# Altium PCB Beacon.PcbDoc
Units mm, origin at the board's own origin, x right, y up, seen from the top; angles counter-clockwise.
Board outline 35 x 35 mm, 2 copper layers (Top Layer, Bottom Layer); 43 components, 60 nets, 170 pads, 40 vias.
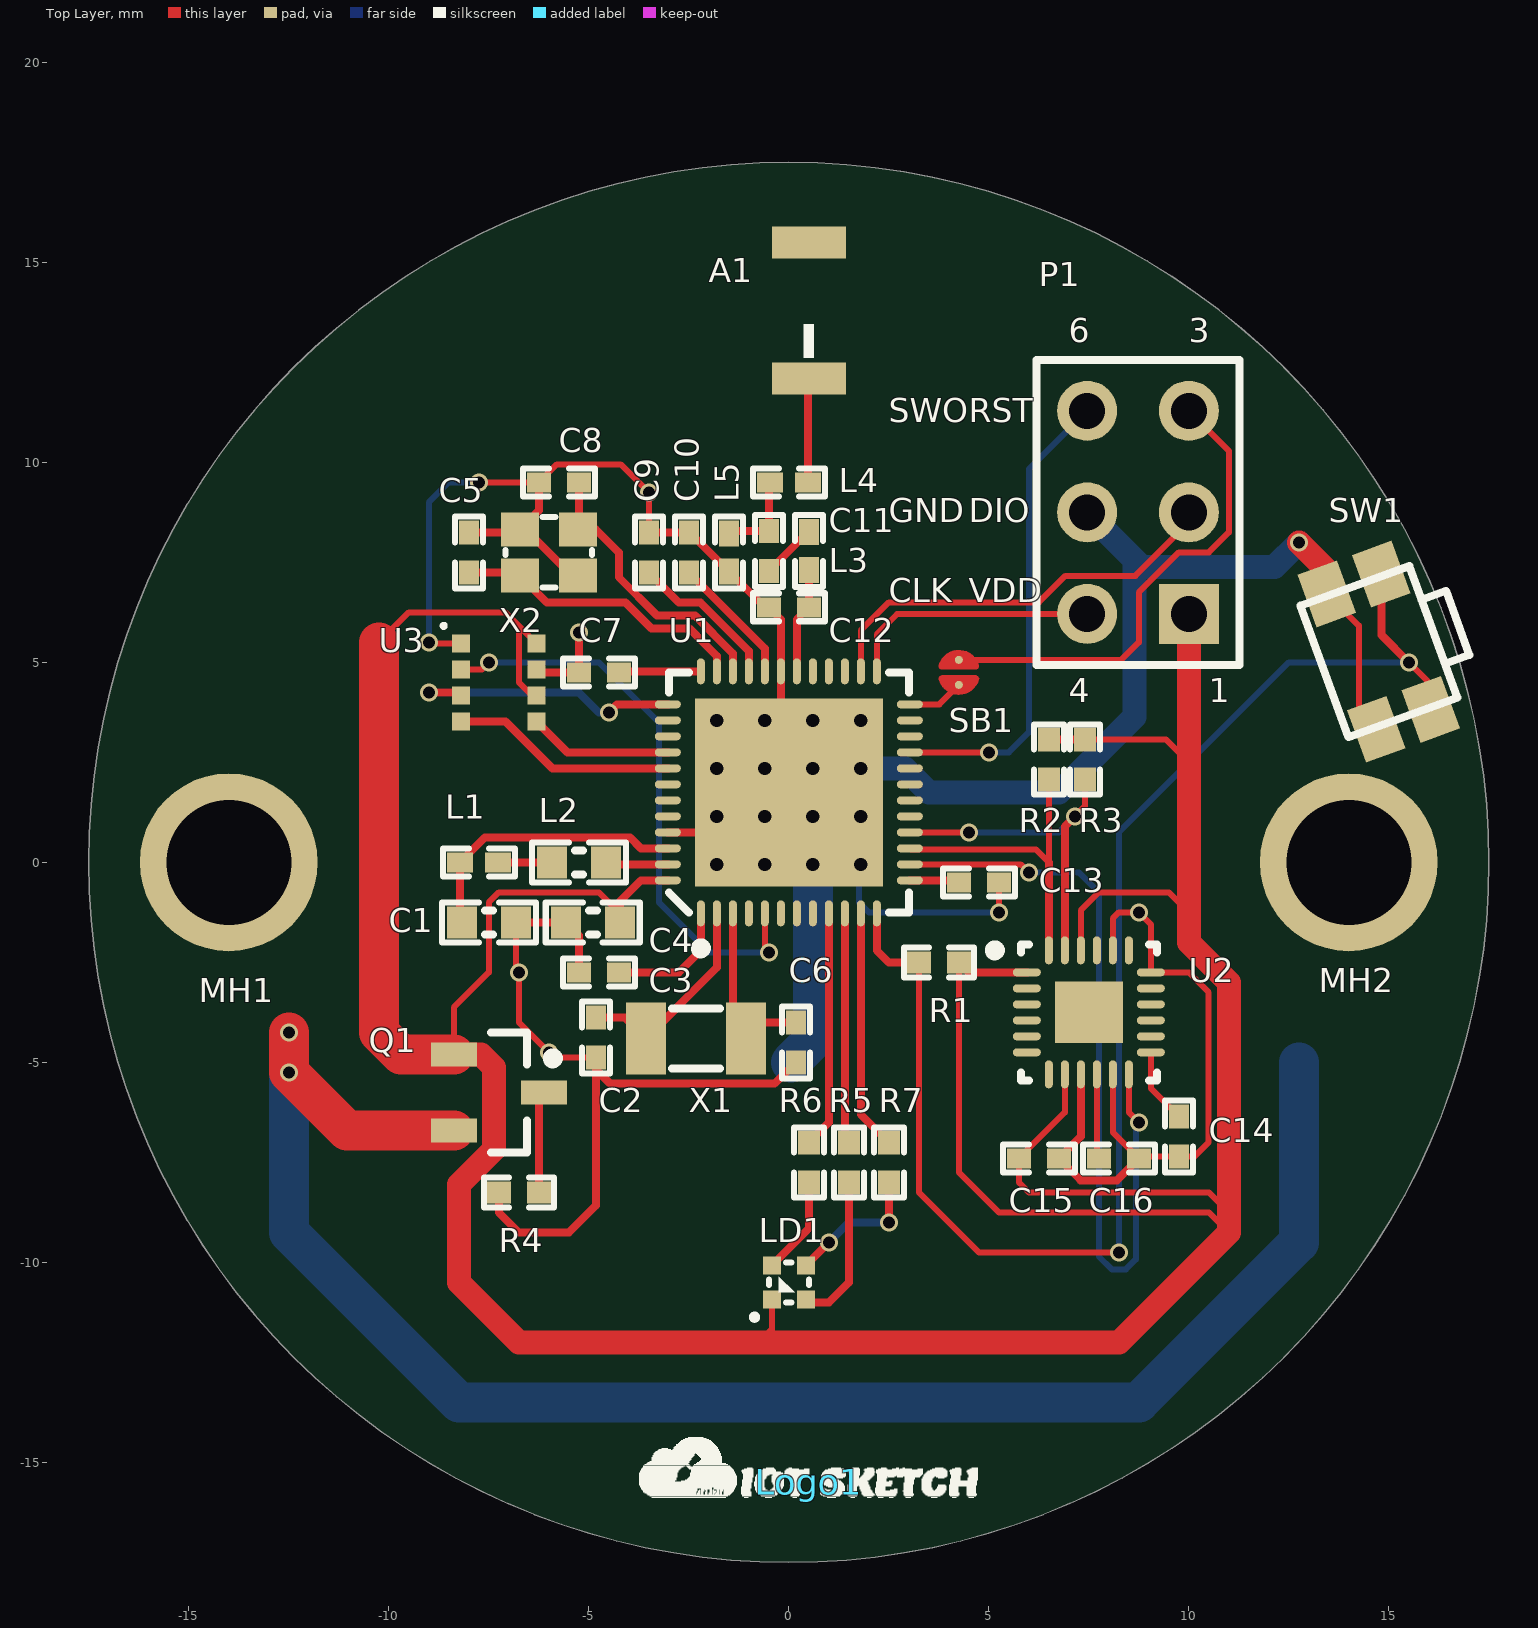
[diagram p0: Top Layer view]
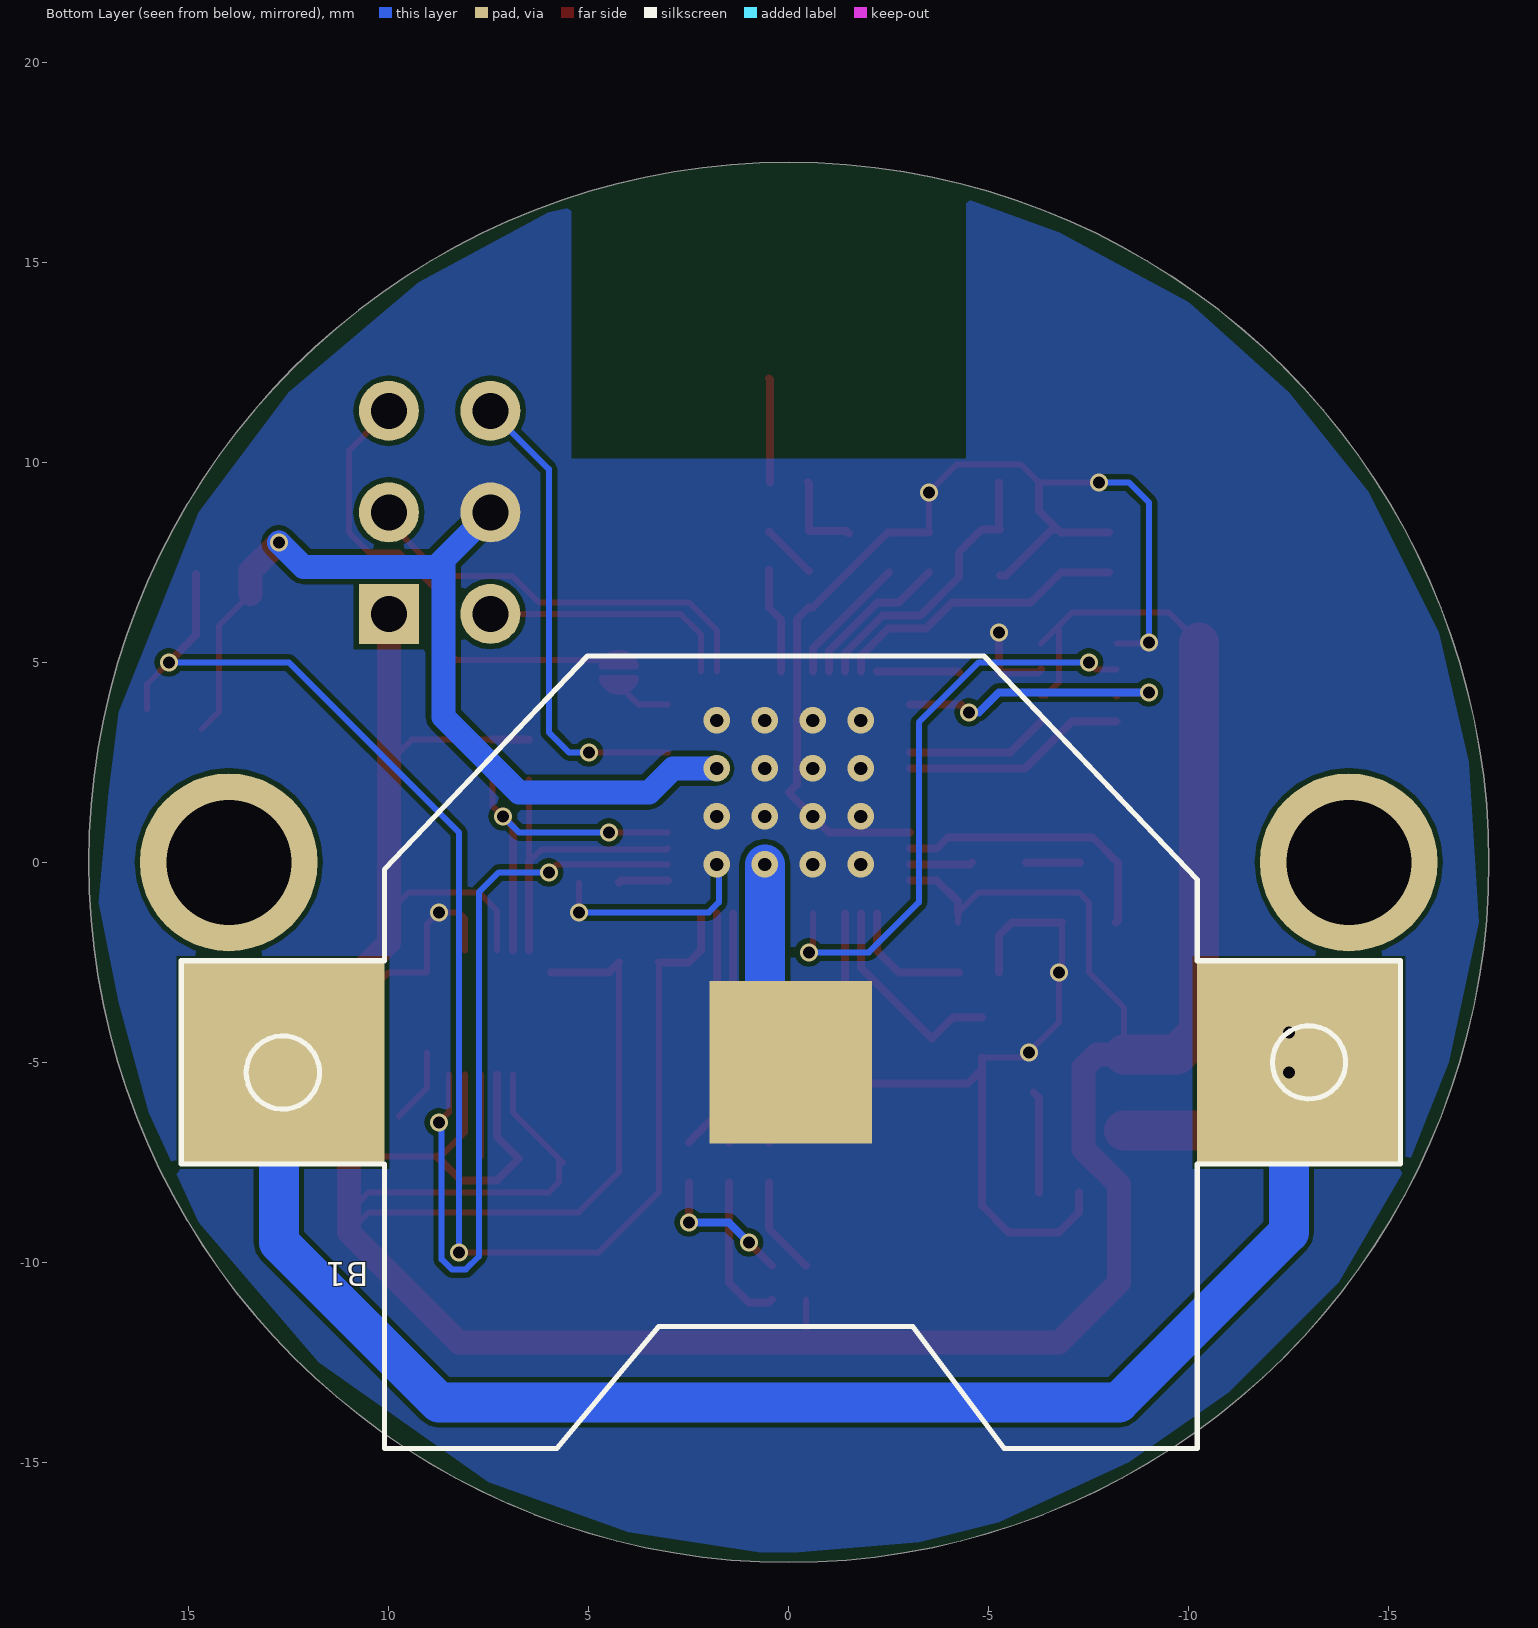
[diagram p1: Bottom Layer view, seen from below]
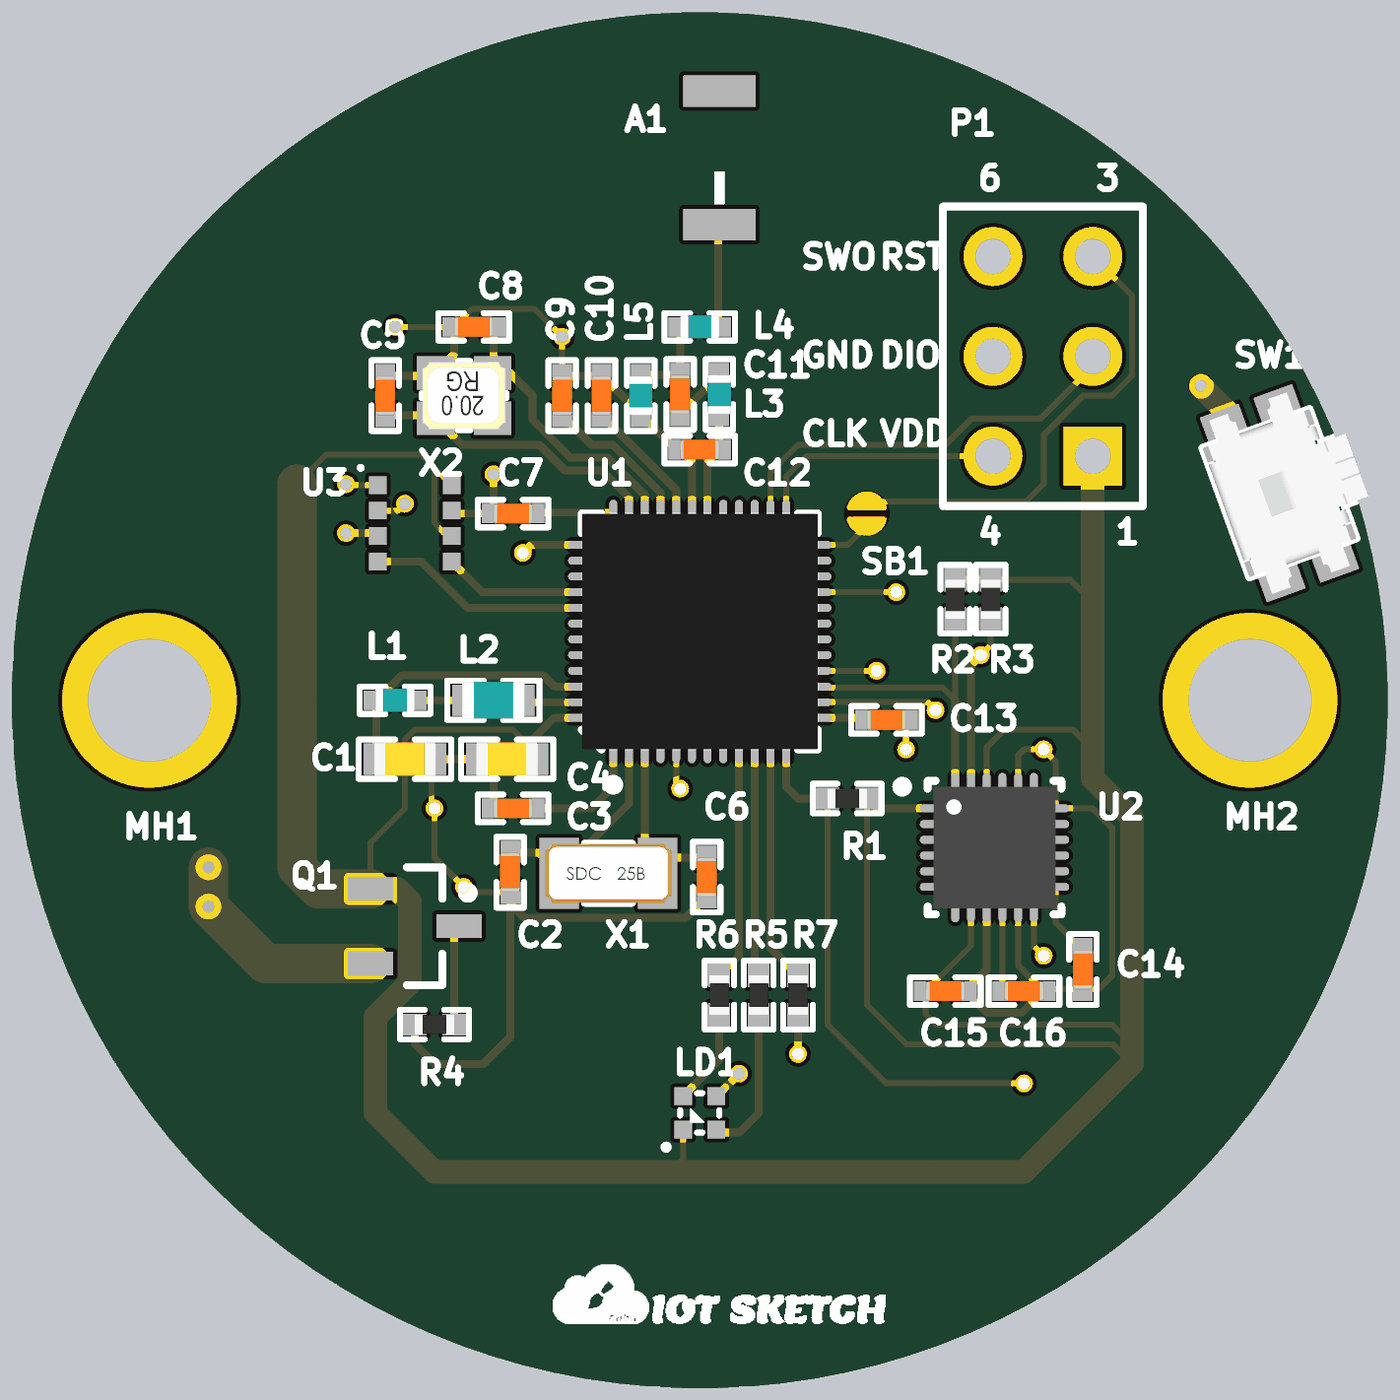
[diagram p2: 3D render of the assembled board from above, using the file's embedded part models]

## Layer stack, top to bottom
Top Solder: solder mask 0.0102, Solder Resist, Dk 3.5
Top Layer: signal copper 0.0356
Dielectric 1: dielectric 0.32, FR-4, Dk 4.8
Bottom Layer: signal copper 0.0356
Bottom Solder: solder mask 0.0102, Solder Resist, Dk 3.5

## Board outline
-17.502,0 ccw(c0,0) 0,-17.502 ccw(c0,0) 17.502,0 ccw(c0,0) 0,17.502 ccw(c0,0)
cut-out: -11.5,-13.25

## Design rules (kind name [scope] priority, off if disabled: settings)
Clearance [All] p1: gap=0.127 ignorepadtopadclearanceinfootprint=FALSE
ComponentClearance [All] p1: gap=0 collisioncheckmode=3 verticalgap=0 showdistances=FALSE
HoleSize [All] p1: absolutevalues=TRUE maxlimit=3.2 minlimit=0.025 maxpercent=80.000 minpercent=20.000
MinimumSolderMaskSliver [All] p1: minsoldermaskwidth=0
PlaneClearance [All] p1: clearance=0.25
PlaneConnect [All] p1: planeconnectstyle=Direct reliefexpansion=0.508 reliefentries=4 reliefconductorwidth=0.254 reliefairgap=0.254
PolygonConnect [All] p1: connectstyle=Direct reliefconductorwidth=0.254 reliefentries=4 polygonreliefangle="90 Angle" airgapwidth=0.254
RoutingVias [All] p1: holewidth=0.3 width=0.45 viastyle="Through Hole" minholewidth=0.3 minwidth=0.45 maxholewidth=0.8 maxwidth=1.2
SilkToSilkClearance [All] p1: silktosilkclearance=0
SilkToSolderMaskClearance [IsPad] p1: minsilkscreentomaskgap=0 clearancetoexposedcopper=TRUE
SolderMaskExpansion [All] p1: expansion=0.102
UnRoutedNet [All] p1: checkbadconnections=TRUE
Width [All] p1: maxlimit=1 minlimit=0.15 preferedwidth=0.2
22 further rules are at their usual default settings.

## Classes and differential pairs
net class RF: ANT GND NetA1_1 NetC11_1 NetC11_2
component class 03Sensors: C14 C15 C16 LD1 Logo1 MH1 MH2 P1 R5 R6 R7 SB1 U2 U3
component class 02NRF52: A1 B1 C1 C2 C3 C4 C5 C6 C7 C8 C9 C10 C11 C12 C13 L1 L2 L3 L4 L5 Q1 R1 R2 R3 R4 SW1 U1 X1 X2

## Components (designator, comment, footprint, x,y, rotation, side; value= is the part's Value field where it differs from the comment)
A1 "2450AT18B100" 2450AT18B100 0.5,13.8 r90 top
B1 "CR2032" CR2032-SMD_CR2032(Primary) -0.05,-5 r0 bottom
C1 "1.0µF" CAPC1608X06L -7.5,-1.5 r180 top
C2 "12pF" CAPC1005X04L -4.823,-4.377 r270 top
C3 "100nF" CAPC1005X04L -4.75,-2.75 r180 top
C4 "4.7µF" CAPC1608X06L -4.901,-1.5 r180 top
C5 "12pF" CAPC1005X04L -8,7.75 r90 top
C6 "12pF" CAPC1005X04L 0.177,-4.5 r270 top
C7 "100nF" CAPC1005X04L -4.75,4.75 r180 top
C8 "12pF" CAPC1005X04L -5.75,9.5 r180 top
C9 "100pF" CAPC1005X04L -3.5,7.75 r90 top
C10 "N.C." CAPC1005X04L -2.5,7.75 r270 top
C11 "1.2pF" CAPC1005X04L -0.5,7.779 r90 top
C12 "0.8pF" CAPC1005X04L 0,6.377 r0 top
C13 "100nF" CAPC1005X04L 4.75,-0.5 r0 top
C14 "100nF" CAPC1005X04L 9.75,-6.851 r90 top
C15 "10nF" CAPC1005X04L 6.25,-7.402 r180 top
C16 "100nF" CAPC1005X04L 8.25,-7.402 r180 top
L1 "15nH" INDC1005X04L -7.75,0 r0 top
L2 "10µH" INDC1608X06L -5.25,0 r0 top
L3 "3.9nH" INDC1005X04L 0.5,7.779 r90 top
L4 "3.3nH" INDC1005X04L 0,9.5 r0 top
L5 "2.7nH" INDC1005X04L -1.5,7.75 r90 top
LD1 "LED RGB" SML-LX0404SIUPGUSB 0,-10.5 r180 top
Logo1 "Logo" Logo 0.5,-15.5 r0 top
MH1 "MH" MH -14,0 r0 top
MH2 "MH" MH 14,0 r0 top
P1 "Header 3X2A" HDR2X3_CEN 10,6.21 r90 top
Q1 "PMOS-2" SOT23_N -7.25,-5.75 r0 top
R1 "10k" RESC1005X04L 3.75,-2.5 r0 top
R2 "4k7" RESC1005X04L 6.5,2.569 r270 top
R3 "4k7" RESC1005X04L 7.403,2.569 r270 top
R4 "10k" RESC1005X04L -6.75,-8.25 r0 top
R5 "680R" RESC1005X04L 1.5,-7.5 r270 top
R6 "2k2" RESC1005X04L 0.5,-7.5 r270 top
R7 "820R" RESC1005X04L 2.5,-7.5 r270 top
SB1 "Solderbridge" Solderbridge 4.25,4.75 r270 top
SW1 "PTS840 GK SMTR LFS" EVQP7A/J/B/K 14.75,5.269 r110 top
U1 "nRF52832-QFAA" QFN40P600X600X90-48N 0,1.75 r90 top
U2 "MPU-9250" QFN40P300X300X105_HS-25N 7.5,-3.75 r0 top
U3 "BME280" PSON65P250X100-8N -7.25,4.5 r0 top
X1 "32.768kHz" XTAL_3215 -2.323,-4.402 r0 top
X2 "32MHz" BT-XTAL_2016 -6,7.75 r180 top

## Footprints (in the part's own frame and the unit in brackets; to place one, negate y for a bottom-side part, rotate by r counter-clockwise, add the part's x,y. Pads: shape width x height; smd on the part's side, far side on the other; paste and mask are expansions set on the pad)
2450AT18B100 [mm]
  rect 0.8x1.85 smd: 1(-1.7,0) 2(1.7,0)
  Top Layer pour cut-out: -3.71,-4.94 -3.71,4.93 6.09,4.93 6.09,-4.94
  Bottom Layer pour cut-out: -3.71,-4.94 -3.71,4.93 6.09,4.93 6.09,-4.94
  silkscreen extent -1.18,-0.14 -0.34,0.14, body extent -1.7,-0.9 1.7,0.9, height 1.4
BT-XTAL_2016 [mm]
  rect 0.95x0.85 smd: 1(-0.725,-0.575) 2(0.725,-0.575) 3(0.725,0.575) 4(-0.725,0.575)
  silkscreen extent -1.08,-0.88 1.08,0.88, body extent -1.05,-0.85 1.05,0.85, height 0.56
CAPC1005X04L [mm]
  rect 0.6x0.5 smd: 1(-0.5,0) 2(0.5,0)
  silkscreen extent -0.9,-0.35 0.9,0.35, body extent -0.51,-0.25 0.51,0.25, height 0.5
CAPC1608X06L [mm]
  rect 0.75x0.8 smd: 1(-0.675,0) 2(0.675,0)
  silkscreen extent -1.17,-0.5 1.17,0.5, body extent -0.8,-0.43 0.8,0.43, height 0.8
CR2032-SMD_CR2032(Primary) [mil]
  rect 160x160 smd: NEG(0,0)
  rect 200x200 smd: POS(-500,0) POS(500,0)
  silkscreen extent -600,-400 600,380, body extent -594,-469 594,315, height 167
EVQP7A/J/B/K [mm]
  rect 1.4x1.05 smd: 1(-1.8,0.725) 1(1.8,0.725) 2(-1.8,-0.725) 2(1.8,-0.725)
  silkscreen extent -1.75,-2.1 1.75,1.45, body extent -2.35,-2.1 2.35,1.45, height 1.35
HDR2X3_CEN [mm] "Connector; Header; 3x2 Position"
  rect 1.5x1.5 hole 0.9: 1(0,0)
  round 1.5 hole 0.9: 2(2.54,0) 3(5.08,0) 4(0,2.54) 5(2.54,2.54) 6(5.08,2.54)
  silkscreen extent -1.27,-1.27 6.35,3.81
INDC1005X04L [mm]
  rect 0.65x0.5 smd: 1(-0.475,0) 2(0.475,0)
  silkscreen extent -0.9,-0.35 0.9,0.35, body extent -0.5,-0.3 0.5,0.3, height 0.5
INDC1608X06L [mm]
  rect 0.75x0.8 smd: 1(-0.675,0) 2(0.675,0)
  silkscreen extent -1.18,-0.5 1.17,0.5, body extent -0.8,-0.48 0.8,0.48, height 0.8
Logo [mm]
  silkscreen extent -4.24,-0.37 4.22,1.13
MH [mm]
  round 4.445 hole 3.125: MH(0,0)
PSON65P250X100-8N [mm] "PSON, 8-Leads, Body 2.50x2.50mm, Pitch 0.65mm, IPC Medium Density"
  rect 0.45x0.45 smd: 1(-0.94,0.975) 2(-0.94,0.325) 3(-0.94,-0.325) 4(-0.94,-0.975) 5(0.94,-0.975) 6(0.94,-0.325) 7(0.94,0.325) 8(0.94,0.975)
  silkscreen extent -1.43,1.36 -1.33,1.46, body extent -1.25,-1.25 1.25,1.25, height 1
QFN40P300X300X105_HS-25N [mm]
  rect 1.7x1.54 smd: 0(0,0)
  oval 0.7x0.2 smd: 1(-1.55,1) 2(-1.55,0.6) 3(-1.55,0.2) 4(-1.55,-0.2) 5(-1.55,-0.6) 6(-1.55,-1) 13(1.55,-1) 14(1.55,-0.6) 15(1.55,-0.2) 16(1.55,0.2) 17(1.55,0.6) 18(1.55,1)
  oval 0.2x0.7 smd: 7(-1,-1.55) 8(-0.6,-1.55) 9(-0.2,-1.55) 10(0.2,-1.55) 11(0.6,-1.55) 12(1,-1.55) 19(1,1.55) 20(0.6,1.55) 21(0.2,1.55) 22(-0.2,1.55) 23(-0.6,1.55) 24(-1,1.55)
  silkscreen extent -2.47,-1.7 1.7,1.7, body extent -1.55,-1.55 1.55,1.55, height 1.05
QFN40P600X600X90-48N [mm]
  oval 0.65x0.2 smd: 1(-3.025,2.2) 2(-3.025,1.8) 3(-3.025,1.4) 4(-3.025,1) 5(-3.025,0.6) 6(-3.025,0.2) 7(-3.025,-0.2) 8(-3.025,-0.6) 9(-3.025,-1) 10(-3.025,-1.4) 11(-3.025,-1.8) 12(-3.025,-2.2) 25(3.025,-2.2) 26(3.025,-1.8) 27(3.025,-1.4) 28(3.025,-1) 29(3.025,-0.6) 30(3.025,-0.2) 31(3.025,0.2) 32(3.025,0.6) 33(3.025,1) 34(3.025,1.4) 35(3.025,1.8) 36(3.025,2.2)
  oval 0.2x0.65 smd: 13(-2.2,-3.025) 14(-1.8,-3.025) 15(-1.4,-3.025) 16(-1,-3.025) 17(-0.6,-3.025) 18(-0.2,-3.025) 19(0.2,-3.025) 20(0.6,-3.025) 21(1,-3.025) 22(1.4,-3.025) 23(1.8,-3.025) 24(2.2,-3.025) 37(2.2,3.025) 38(1.8,3.025) 39(1.4,3.025) 40(1,3.025) 41(0.6,3.025) 42(0.2,3.025) 43(-0.2,3.025) 44(-0.6,3.025) 45(-1,3.025) 46(-1.4,3.025) 47(-1.8,3.025) 48(-2.2,3.025)
  rect 4.7x4.7 smd: 49(0,0)
  silkscreen extent -4.02,-3 3,3, body extent -3.02,-3.02 3.02,3.02, height 0.86
RESC1005X04L [mm]
  rect 0.6x0.55 smd: 1(-0.5,0) 2(0.5,0)
  silkscreen extent -0.87,-0.38 0.88,0.38, body extent -0.5,-0.25 0.5,0.25, height 0.3
SML-LX0404SIUPGUSB [mm]
  rect 0.45x0.45 smd paste+0: 1(0.425,-0.425) 2(-0.425,0.425) 3(-0.425,-0.425) 4(0.425,0.425)
  silkscreen extent -0.5,-0.5 0.92,0.93, body extent -0.5,-0.5 0.5,0.5, height 0.25
Solderbridge [mm]
  round 0.2 smd paste-10: 1(-0.312,0) 2(0.312,0)
  Top Layer region: 0.077,0.432 0.152,0.505 0.271,0.467 0.335,0.424 0.409,0.351 0.462,0.292 0.521,0.193 0.549,0.099 0.544,-0.122 0.518,-0.193 0.434,-0.33 0.351,-0.411 0.259,-0.469 0.157,-0.5 0.107,-0.483 0.077,-0.43
  Top Layer region: -0.077,-0.432 -0.152,-0.505 -0.271,-0.467 -0.335,-0.424 -0.409,-0.351 -0.462,-0.292 -0.521,-0.193 -0.549,-0.099 -0.544,0.122 -0.518,0.193 -0.434,0.33 -0.351,0.411 -0.259,0.469 -0.157,0.5 -0.107,0.483 -0.077,0.43
  Top Layer lines w0.152: 0.153,-0.431 ccw(c0.042,0) 0.312,-0.353 ccw(c0.042,0) 0.461,-0.149 ccw(c0.042,0) 0.153,0.431 ; -0.153,-0.431 cw(c-0.042,0) -0.312,0.353 cw(c-0.042,0) -0.25,0.393 cw(c-0.042,0) -0.153,0.431
SOT23_N [mm] "SOT23, 3-Leads, Body 2.9x1.3mm, Pitch 0.95mm, Lead Span 2.3mm - Reverse Pinning, IPC Medium Density"
  rect 1.15x0.6 smd: 1(1.125,0) 2(-1.125,-0.95) 3(-1.125,0.95)
  silkscreen extent -0.2,-1.5 1.48,1.5, body extent -0.7,-1.5 0.7,1.5, height 1.1
XTAL_3215 [mm]
  rect 1x1.8 smd: 1(-1.25,0) 2(1.25,0)
  silkscreen extent -0.6,-0.75 0.6,0.75, body extent -1.6,-0.75 1.6,0.75, height 0.81

## Part data
A1: library part Antenna, "2.45 GHz chip antenna", Manufacturer="Johanson Technology", Part Number="Johanson 2450AT18B100", Supplier part number=712-1006-1-ND, Artikkelnr Noca=N.A., Artikkelnr Simpro=N.A., Datasheet=http://www.johansontechnology.com/datasheets/antennas/2450AT18B100.pdf, Footprint Doc=2450AT18B100, LatestRevisionDate=2013-09-13, Manufacturer Part Number=2450AT18B100, Pin Count=2, Published=2013-09-13, Publisher="Nordic Semiconductor", Supplier=Digi-Key
B1: "Energizer CR2032 Lithium Button Cell Battery", Package=FDK, Availability=Unavailable, MF="Panasonic -", MP=CR2032, Price="2.67 USD", SnapEDA_Link=https://www.snapeda.com/parts/CR2032/Panasonic%20-%20BSG/view-part/?ref=snap
C1: library part CAP, "Capacitor, X7R, ±10%", Part Number=C0603-1µ0, Artikkelnr Noca=20039335, Artikkelnr Simpro=N.A., Footprint Doc=0603, LatestRevisionDate=2013-06-05, Note=16V, Pin Count=2, Published=2009-05-08, Publisher="Nordic Semiconductor"
C2 C5 C6 C8: library part CAP, "Capacitor, NP0, ±2%", Part Number=C0402-12p, Artikkelnr Noca=20029159, Artikkelnr Simpro=N.A., Footprint Doc=0402, LatestRevisionDate=2011-05-11, Note=50V, Pin Count=2, Published=2009-05-08, Publisher="Nordic Semiconductor"
C3 C7 C13 C14 C16: library part CAP, "Capacitor, X7R, ±10%", Part Number=C0402-100n, Artikkelnr Noca=20039200, Artikkelnr Simpro=N.A., Footprint Doc=0402, LatestRevisionDate=2009-11-23, Note=16V, Pin Count=2, Published=2009-05-08, Publisher="Nordic Semiconductor"
C4: library part CAP, "Capacitor, X5R, ±10%", Part Number=C0603-4µ7, Artikkelnr Noca=20069060, Artikkelnr Simpro=N.A., Footprint Doc=0603, LatestRevisionDate=2009-11-23, Note=6.3V, Pin Count=2, Published=2009-05-08, Publisher="Nordic Semiconductor"
C9: library part CAP, "Capacitor, NP0, ±5%", Part Number=C0402-100p, Artikkelnr Noca=20029135, Artikkelnr Simpro=N.A., Footprint Doc=0402, LatestRevisionDate=2009-05-08, Note=50V, Pin Count=2, Published=2009-05-08, Publisher="Nordic Semiconductor"
C10: library part CAP, "Not mounted", Part Number=C0402-N.C., Artikkelnr Noca=N.A., Artikkelnr Simpro=N.A., Assembly="Not mounted", Footprint Doc=0402, LatestRevisionDate=2009-05-08, Note="Chip Cap", Pin Count=2, Published=2009-05-08, Publisher="Nordic Semiconductor"
C11: library part CAP, "Capacitor, NP0, ±0.1pF", Part Number=C0402-1.2p, Artikkelnr Noca=20029157, Artikkelnr Simpro=N.A., Footprint Doc=0402, LatestRevisionDate=2011-05-11, Note=50V, Pin Count=2, Published=2009-05-08, Publisher="Nordic Semiconductor"
C12: library part CAP, "Capacitor, NP0, ±5%", Part Number=C0402-0.8p, Artikkelnr Noca=20029147, Artikkelnr Simpro=N.A., Footprint Doc=0402, LatestRevisionDate=2012-11-21, Note=50V, Pin Count=2, Published=2009-05-08, Publisher="Nordic Semiconductor"
C15: library part CAP, "Capacitor, X7R, ±10%", Part Number=C0402-10n, Artikkelnr Noca=20039166, Artikkelnr Simpro=N.A., Footprint Doc=0402, LatestRevisionDate=2009-11-23, Note=16V, Pin Count=2, Published=2009-05-08, Publisher="Nordic Semiconductor"
L1: library part IND, "Inductor, 320mA, ±5%", 2nd source part number=658-1328, Manufacturer="Taiyo Yuden", Manufacturer Part Number=HK100515NJ-T, Part Number=L0402-15n, Supplier part number=587-1521-1-ND, 2nd source Supplier=Farnell, Artikkelnr Noca=33029323, Artikkelnr Simpro=N.A., Datasheet=http://www.yuden.co.jp/productdata/catalog/en/mlci04_e.pdf, Footprint Doc=0402, LatestRevisionDate=2012-09-19, Note="High frequency chip inductor ±10%", Pin Count=2, Published=2010-07-12, Publisher="Nordic Semiconductor", Supplier=Digi-Key
L2: library part IND, "Inductor, 80mA, ±10%", 2nd source part number=178-6105, Manufacturer="Taiyo Yuden", Manufacturer Part Number=LBMF1608T100K, Part Number=L0603-10µ, Supplier part number=587-1714-1-ND, 2nd source Supplier=Farnell, Artikkelnr Noca=33029314, Artikkelnr Simpro=N.A., Datasheet=http://www.yuden.co.jp/ut/product/pdf/elb2_e.pdf, Footprint Doc=0603, LatestRevisionDate=2012-09-19, Note="LBMF1608T100K 10µH 80mA 0603", Pin Count=2, Published=2010-02-24, Publisher="Nordic Semiconductor", Supplier=Digi-Key
L3: library part IND, "Inductor, 170mA, ±0.1nH", Manufacturer=Murata, Manufacturer Part Number=LQP15MN3N9B02D, Part Number=L0402-3n9, Supplier part number=490-1131-1-ND, Artikkelnr Noca=33029151, Artikkelnr Simpro=N.A., Datasheet=http://search.murata.co.jp/Ceramy/image/img/PDF/ENG/L0075S0084LQP15M.pdf, Footprint Doc=0402, LatestRevisionDate=2012-09-19, Note="High frequency chip inductor ±5%", Pin Count=2, Published=2009-05-08, Publisher="Nordic Semiconductor", Supplier=Digi-Key
L4: library part IND, "Inductor, 190mA, ±0.1nH", Manufacturer=Murata, Manufacturer Part Number=LQP15MN3N3B02D, Part Number=L0402-3n3, Supplier part number=490-1130-1-ND, Artikkelnr Noca=33029369, Artikkelnr Simpro=N.A., Datasheet=http://search.murata.co.jp/Ceramy/image/img/PDF/ENG/L0075S0084LQP15M.pdf, Footprint Doc=0402, LatestRevisionDate=2012-09-19, Note="High frequency chip inductor ±5%", Pin Count=2, Published=2009-05-08, Publisher="Nordic Semiconductor", Supplier=Digi-Key
L5: library part IND, "Inductor, 220mA, ±0.1nH", Manufacturer=Murata, Manufacturer Part Number=LQP15MN2N7B02D, Part Number=L0402-2n7, Supplier part number=490-1129-1-ND, Artikkelnr Noca=33029150, Artikkelnr Simpro=N.A., Datasheet=http://search.murata.co.jp/Ceramy/image/img/PDF/ENG/L0075S0084LQP15M.pdf, Footprint Doc=0402, LatestRevisionDate=2012-09-19, Note="High frequency chip inductor ±5%", Pin Count=2, Published=2009-05-08, Publisher="Nordic Semiconductor", Supplier=Digi-Key
LD1: library part D:LED_RGB, "RGB LED 1.00 mm x 1.00 mm SMD", 2nd source part number=211-8843, Manufacturer=Lumex, Manufacturer Part Number=SML-LX0404SIUPGUSB, Supplier part number=67-2125-1-ND, 2nd source Supplier=Farnell, Artikkelnr Noca=13019150, Artikkelnr Simpro=N.A., Datasheet=http://media.digikey.com/pdf/Data%20Sheets/Lumex%20PDFs/SML-LX0404SIUPGUSB.pdf, Footprint Doc=SML-LX0404SIUPGUSB, LatestRevisionDate=2012-10-08, Part Number=SML-LX0404SIUPGUSB, Pin Count=4, Published=2012-10-08, Publisher="Nordic Semiconductor", Supplier=Digi-Key
P1: "Header, 3-Pin, Dual row", LatestRevisionDate=17-Jul-2002, LatestRevisionNote="Re-released for DXP Platform.", Publisher="Altium Limited"
Q1: "P-Channel Power MOSFET", ComponentLink1Description="Manufacturer Link", ComponentLink1URL=http://www.irf.com/, DatasheetVersion=PD-9.390D, LatestRevisionDate=17-Jul-2002, LatestRevisionNote="Re-released for DXP Platform.", Note="Pin 4 not drawn and electrically connected to Pin 2.", PackageDescription="TO, Thru-Hole, Vertical, Heatsink Mounted; 3 In-Line Leads; Pitch 2.54 mm", PackageReference=TO-220AB, PackageVersion=Feb-1997, Published=8-Jun-2000, Publisher="Altium Limited"
R1 R4: library part RES_1, "Resistor, ±1%, 0.063W", Part Number=R0402-10k, Supplier part number=173-8864, Value Ohm=10000, Artikkelnr Noca=27049097, Artikkelnr Simpro=N.A., Footprint Doc=0402, LatestRevisionDate=2009-11-23, Note="Chip Res 1%", Pin Count=2, Published=2009-05-08, Publisher="Nordic Semiconductor", Supplier=Farnell
R2 R3: library part RES_1, "Resistor, ±1%, 0.063W", Part Number=R0402-4k7, Supplier part number=173-8858, Value Ohm=4700, Artikkelnr Noca=27049089, Artikkelnr Simpro=N.A., Footprint Doc=0402, LatestRevisionDate=2009-11-23, Note="Chip Res 1%", Pin Count=2, Published=2009-05-08, Publisher="Nordic Semiconductor", Supplier=Farnell
R5: library part RES_1, "Resistor, ±1%, 0.063W", Part Number=R0402-680, Supplier part number=173-8848, Value Ohm=680, Artikkelnr Noca=27049069, Artikkelnr Simpro=N.A., Footprint Doc=0402, LatestRevisionDate=2009-11-23, Note="Chip Res 1%", Pin Count=2, Published=2009-05-08, Publisher="Nordic Semiconductor", Supplier=Farnell
R6: library part RES_1, "Resistor, ±1%, 0.063W", Part Number=R0402-2k2, Supplier part number=173-8854, Value Ohm=2200, Artikkelnr Noca=27049081, Artikkelnr Simpro=N.A., Footprint Doc=0402, LatestRevisionDate=2009-11-23, Note="Chip Res 1%", Pin Count=2, Published=2009-05-08, Publisher="Nordic Semiconductor", Supplier=Farnell
R7: library part RES_1, "Resistor, ±1%, 0.063W", Part Number=R0402-820, Supplier part number=173-8849, Value Ohm=820, Artikkelnr Noca=27049071, Artikkelnr Simpro=N.A., Footprint Doc=0402, LatestRevisionDate=2009-11-23, Note="Chip Res 1%", Pin Count=2, Published=2009-05-08, Publisher="Nordic Semiconductor", Supplier=Farnell
SB1: library part SOLDERBRIDGE, Artikkelnr Noca=N.A., Artikkelnr Simpro=N.A., Footprint Doc=Solderbridge, LatestRevisionDate=2009-12-14, Part Number=Solderbridge, Pin Count=2, Published=2009-12-14, Publisher="Nordic Semiconductor"
SW1: "Microminiature SMT Switch, Side Actuated", 2nd source part number=611-PTS840GKSMTR, Manufacturer="C & K", Supplier part number=CKN10508CT-ND, 2nd source Supplier=Mouser, Artikkelnr Noca=50019089, Artikkelnr Simpro=N.A., Datasheet=http://www.ck-components.com/80185/pts840_11june13.pdf/, Footprint Doc="PTS840 Gx", LatestRevisionDate=2014-09-17, Manufacturer Part Number="PTS840 GK SMTR LFS", Note="Tactile Switch, SPST, SMD, 220gf", Part Number="PTS840 GK SMTR LFS", Pin Count=4, Published=2014-08-12, Publisher="Nordic Semiconductor", Supplier=Digi-Key
U1: "Multi-protocol Bluetooth Low Energy, ANT and 2.4GHz proprietary system-on-chip", Manufacturer="Nordic Semiconductor", Artikkelnr Noca=15079306, Artikkelnr Simpro=N.A., Footprint Doc=QFN-48, LatestRevisionDate=2016-06-02, Manufacturer Part Number=nRF52832-QFAA, Part Number=nRF52832-QFAA, Pin Count=48, Published=2014-11-26, Publisher="Nordic Semiconductor", Supplier="Nordic Semiconductor"
U2: "9-axis MotionTracking™ Device", Manufacturer=InvenSense, Supplier part number=1428-1019-1-ND, Artikkelnr Noca=N.A., Artikkelnr Simpro=N.A., Datasheet=http://43zrtwysvxb2gf29r5o0athu.wpengine.netdna-cdn.com/wp-content/uploads/2015/02/MPU-9250-Datasheet.pdf, Footprint Doc=QFN-24, LatestRevisionDate=2015-06-24, Manufacturer Part Number=MPU-9250, Note="3-Axis Gyro, 3-Axis Accel and 3-Axis Compass", Part Number=MPU-9250, Pin Count=24, Published=2015-06-24, Publisher="Nordic Semiconductor", Supplier=Digi-Key
X1: library part XTAL_2-pin, "XTAL SMD 2012, 32.768kHz, 9pF, ±20ppm", Manufacturer=Seiko, Manufacturer Part Number=SC32S-9.0PF20PPM, Part Number=XTAL_SMD3215_32.768kHz_9pF_Seiko, Artikkelnr Noca=N.A., Artikkelnr Simpro=N.A., Datasheet=http://www.sii.co.jp/en/quartz/files/2013/03/file_PRODUCT_MASTER_50812_GRAPHIC03.pdf, Footprint Doc=XTAL_3215, LatestRevisionDate=2015-10-15, Note="XTAL SMD 32.768kHz, 3215", Pin Count=2, Published=2015-10-15, Publisher="Nordic Semiconductor"
X2: library part XTAL_4-pin_grounded, "XTAL SMD 2016, 32MHz, Cl=8pF, Tot: ±40ppm", Manufacturer=Kyocera, Manufacturer Part Number=CX2016DB32000D0WZRC1, Part Number=XTAL_SMD2016_32MHz_8pF_Kyocera, Supplier part number=1253-1586-1-ND, Artikkelnr Noca=22010022, Artikkelnr Simpro=N.A., Datasheet=http://media.digikey.com/pdf/Data%20Sheets/AVX%20PDFs/CX2016DB32000D0WZRC1_Spec.pdf, Footprint Doc=XTAL_2016, LatestRevisionDate=2016-06-02, Note="XTAL SMD 32.000MHz", Pin Count=4, Published=2015-10-15, Publisher="Nordic Semiconductor", Supplier=Digi-Key

## Via types
v1: diameter 0.45, hole 0.3, Top Layer to Bottom Layer, 24 vias
v2: diameter 0.66, hole 0.33, Top Layer to Bottom Layer, 16 vias

## Nets (pads, with @x,y where several pads share a name; then routed paths per layer and width w, separated by ;. In a path a pad name is that pad's centre, name@x,y a point inside that pad or via, vN(x,y) a via of type N, cw(c..) or ccw(c..) an arc to the next point about the centre after c; other vN are vias at no path point)
ANT: C12.2 L3.1 U1.30 | length 2.7
  Top Layer w0.2: U1.30 0.2,6.077 C12.2 L3.1
AUX_CL: U2.7
AUX_DA: U2.21
DEC1: C3.1 U1.1 | length 3.2
  Top Layer w0.2: C3.1 -2.75,-2.75 -2.2,-2.2 U1.1
DEC2: C10.2 U1.32 | length 3.3
  Top Layer w0.2: C10.2 -0.6,5.35 U1.32
DEC3: C9.1 U1.33 | length 3.8
  Top Layer w0.2: C9.1 -2.75,6.5 -2.212,6.5 -1,5.288 U1.33
GND: B1.NEG C1.1 C2.2 C3.2 C4.2 C5.2 C6.2 C7.2 C8.2 C9.2 C10.1 C12.1 C13.2 C14.1 C15.1 C16.1 L5.1 P1.5 R4.1 SW1.1 U1.31 U1.45 U1.49 U2.9 U2.11 U2.18 U2.20 U3.1 U3.7 X2.2 X2.4 | length 101.7
  Top Layer w0.15: v1(-9,5.5) -8.975,5.475 U3.1 ; v1(-7.75,9.5) C8.2 -5.798,9.952 -4.202,9.952 v1(-3.5,9.25) C9.2 ; C1.1 -6.825,-2.675 v1(-6.75,-2.75) -6.75,-4 v1(-6,-4.75) -5.873,-4.877 C2.2 ; v1(5.25,-1.25) C13.2 ; U2.11 8.1,-6.752 C16.1 ; U2.20 8.1,-1.4 8.25,-1.25 v1(8.75,-1.25) 9.05,-1.55 U2.18 10,-2.75 10.498,-3.248 10.498,-7 10.147,-7.351 C14.1 C16.1@8.8,-7.351 ; SW1.1@13.453,6.712 14.25,5.915 14.25,3.764 SW1.1@14.684,3.33
  Top Layer w0.2: C5.2 -6.8,8.25 X2.2 ; R4.1 -7.25,-8.75 -6.75,-9.25 -5.5,-9.25 -4.823,-8.573 C2.2@-4.823,-5.177 ; C1.1 C4.2 -5.25,-1.826 C3.2 ; U3.7 -6.235,4.75 C7.2 v1(-5.25,5.75) ; C8.2 -6.25,8.8 X2.2 ; X2.4 -5.425,7.175 -6.575,8.325 X2.2 ; C2.2 C2.2@-4.823,-5.177 ; C9.2 C10.1 -2.475,8.25 L5.1 -0.602,6.377 C12.1 -0.2,6.077 U1.31 -0.2,1.95 U1.49 v2(-0.6,1.15) -1,0.75 U1.45 ; C6.2 -0.352,-5.529 -4.471,-5.529 C2.2@-4.823,-5.177 ; U2.9 7.3,-6.852 C15.1 7.296,-7.948 8.204,-7.948 C16.1 C16.1@8.8,-7.351
  Top Layer w0.6: v1(12.75,8) 13.453,7.297 SW1.1@13.453,6.712
  Bottom Layer w0.15: v1(-9,5.5) -9,9 -8.5,9.5 v1(-7.75,9.5) ; v2(1.8,-0.05) 1.75,-0.1 1.75,-1 2,-1.25 v1(5.25,-1.25)
  Bottom Layer w0.6: v2(1.8,2.35) 2.9,2.35 3.5,1.75 6.75,1.75 8.637,3.637 8.637,7.573 ; P1.5 8.637,7.573 ; v1(12.75,8) 12.137,7.387 8.823,7.387 8.637,7.573
  Bottom Layer w1: B1.NEG@0.05,-5 0.6,-4.45 v2(0.6,-0.05)
  other v2: -1.8,-0.05 -0.6,-0.05 -1.8,1.15 0.6,1.15 1.8,1.15 -1.8,2.35 -0.6,2.35 0.6,2.35 -1.8,3.55 -0.6,3.55 0.6,3.55 1.8,3.55
GPIO2: U1.4
GPIO4: U1.6
GPIO5: U1.7
GPIO6: U1.8
GPIO10: R1.1 SW1.2 U1.12 | length 36.9
  Top Layer w0.15: R1.1 3.25,-8.25 4.75,-9.75 v1(8.25,-9.75) ; v1(15.5,5) 16.047,4.453 SW1.2@16.047,3.825
  Top Layer w0.2: U1.12 2.2,-2.2 2.5,-2.5 R1.1 ; SW1.2@14.816,7.208 14.816,5.684 v1(15.5,5)
  Bottom Layer w0.15: v1(8.25,-9.75) 8.25,0.75 12.5,5 v1(15.5,5)
GPIO14: U1.17
GPIO15: U1.18
GPIO16: U1.19
GPIO17: U1.20
GPIO19: U1.22
GPIO20: U1.23
GPIO22: U1.27
GPIO23: U1.28
GPIO24: U1.29
GPIO26: U1.38
GPIO27: U1.39
GPIO30: U1.42
GPIO31: U1.43
INT_IMU: U1.14 U2.12 | length 20
  Top Layer w0.15: U1.14 3.025,-0.048 5.798,-0.048 v1(6,-0.25) ; U2.12 8.5,-6.25 v1(8.75,-6.5)
  Bottom Layer w0.15: v1(6,-0.25) 7.25,-0.25 7.75,-0.75 7.75,-9.854 8.073,-10.177 8.427,-10.177 8.677,-9.927 8.677,-6.573 v1(8.75,-6.5)
LED_B: R7.1 U1.11 | length 6
  Top Layer w0.2: U1.11 1.8,-6.3 R7.1
LED_G: R5.1 U1.10 | length 5.8
  Top Layer w0.2: U1.10 1.4,-6.9 R5.1
LED_R: R6.1 U1.9 | length 5.9
  Top Layer w0.2: R6.1 1,-6.5 U1.9
NetA1_1: A1.1 L4.2 | length 2.6
  Top Layer w0.2: L4.2 0.475,12.075 A1.1
NetB1_POS: B1.POS Q1.2 | length 42.9
  Top Layer w1: v1(-12.5,-4.25) v1(-12.5,-5.25) -11.05,-6.7 Q1.2
  Bottom Layer w1: v1(-12.5,-5.25) -12.5,-9.25 -8.25,-13.5 8.75,-13.5 12.75,-9.5 B1.POS@12.75,-5
NetC1_2: C1.2 L1.1 U1.46 | length 7.1
  Top Layer w0.2: C1.2 -8.225,-1.45 L1.1 -7.598,0.627 -3.973,0.627 -3.696,0.35 U1.46
NetC7_1: C7.1 U1.36 | length 2.1
  Top Layer w0.2: C7.1 -4.225,4.775 U1.36
NetC11_1: C11.1 L3.2 | length 1.4
  Top Layer w0.2: C11.1 0.475,8.254 L3.2
NetC11_2: C11.2 L4.1 L5.2 | length 2.3
  Top Layer w0.2: L5.2 -1.446,8.279 C11.2 -0.5,9.475 L4.1
NetC13_1: C13.1 U1.13 | length 1.2
  Top Layer w0.2: U1.13 4.2,-0.45 C13.1
NetC14_2: C14.2 U2.13 | length 1.9
  Top Layer w0.15: U2.13 9.05,-5.651 C14.2
NetC16_2: C16.2 U2.10 | length 2.1
  Top Layer w0.15: U2.10 7.7,-7.352 C16.2
NetL1_2: L1.2 L2.1 | length 1.4
  Top Layer w0.2: L1.2 L2.1
NetL2_2: L2.2 U1.47 | length 1.6
  Top Layer w0.2: L2.2 -4.525,-0.05 U1.47
NetLD1_1: LD1.1 R6.2 | length 2.5
  Top Layer w0.2: LD1.1 0.5,-9.15 R6.2
NetLD1_2: LD1.2 R5.2 | length 3.8
  Top Layer w0.2: LD1.2 0.5,-11 1,-11 1.5,-10.5 R5.2
NetLD1_3: LD1.3 R7.2 | length 3.5
  Top Layer w0.2: LD1.3 v1(1,-9.5) ; v1(2.5,-9) R7.2
  Bottom Layer w0.2: v1(1,-9.5) 1.5,-9 v1(2.5,-9)
NetP1_3: P1.3 SB1.1 | length 12.3
  Top Layer w0.15: SB1.1 4.603,5.062 8.312,5.062 8.75,5.5 8.75,6.75 9.75,7.75 10.5,7.75 11,8.25 11,10.29 P1.3
NetQ1_1: Q1.1 R4.2 | length 2.6
  Top Layer w0.2: R4.2 -6.25,-5.875 Q1.1
RESET: SB1.2 U1.24 | length 1.4
  Top Layer w0.15: U1.24 3.762,3.95 4.101,4.289 SB1.2
SCL: R3.2 U1.16 U2.23 | length 8.8
  Top Layer w0.15: U1.16 v1(4.5,0.75) ; v1(7.151,1.151) 7.403,1.403 R3.2
  Top Layer w0.2: U2.23 6.9,0.9 v1(7.151,1.151)
  Bottom Layer w0.15: v1(4.5,0.75) 6.75,0.75 v1(7.151,1.151)
SDA: R2.2 U1.15 U2.24 | length 7.9
  Top Layer w0.15: U1.15 3.052,0.323 6.177,0.323 6.5,0 R2.2
  Top Layer w0.2: U2.24 6.5,0
SPI_HUMI_CS: U1.5 U3.2 | length 14.4
  Top Layer w0.15: U3.2 -7.675,4.825 v1(-7.5,5) ; U1.5 -0.6,-2.15 v1(-0.5,-2.25)
  Bottom Layer w0.15: v1(-7.5,5) -4.75,5 -3.25,3.5 -3.25,-1 -2,-2.25 v1(-0.5,-2.25)
SPI_MISO: U1.40 U3.5 | length 3.6
  Top Layer w0.2: U3.5 -5.535,2.75 U1.40
SPI_MOSI: U1.37 U3.3 | length 7.1
  Top Layer w0.2: v1(-9,4.25) -8.265,4.25 U3.3 ; v1(-4.5,3.75) -4.3,3.95 U1.37
  Bottom Layer w0.2: v1(-9,4.25) -5.25,4.25 -4.75,3.75 v1(-4.5,3.75)
SPI_SCK: U1.41 U3.4 | length 5.7
  Top Layer w0.2: U3.4 -7.081,3.525 -5.906,2.35 U1.41
SWDCLK: P1.4 U1.25 | length 6.4
  Top Layer w0.15: U1.25 2.2,5.7 2.71,6.21 P1.4
SWDIO: P1.2 U1.26 | length 10.6
  Top Layer w0.15: U1.26 1.8,5.8 2.5,6.5 6.25,6.5 6.912,7.162 8.662,7.162 10,8.5 P1.2
SWO: P1.6 U1.21 | length 11.8
  Top Layer w0.15: U1.21 v1(5,2.75)
  Bottom Layer w0.15: v1(5,2.75) 5.5,2.75 6,3.25 6,9.83 P1.6
VDD_NRF: C4.1 C15.2 LD1.4 P1.1 Q1.3 R1.2 R2.1 R3.1 U1.48 U2.1 U2.8 U2.22 U3.6 U3.8 | length 104.1
  Top Layer w0.15: -10.25,5.5 -9.5,6.25 -7.085,6.25 -6.698,5.863 ; Q1.3 -8.375,-3.625 -7.5,-2.75 -7.5,-1 -7.25,-0.75 -4.75,-0.75 -4.226,-1.274 C4.1 ; U3.6 -6.425,4.175 -6.75,4.5 -6.75,5.81 -6.698,5.863 ; U3.8 -6.698,5.863 ; -0.75,-12 -0.425,-11.675 LD1.4 ; R1.2 4.25,-7.75 5.25,-8.75 10.5,-8.75 11,-9.25 ; C15.2@5.652,-7.5 C15.2 ; U2.8 6.9,-6.252 C15.2 ; U2.22 7.3,-1.2 7.75,-0.75 9.5,-0.75 10,-1.25 ; R3.1 9.431,3.069 10,2.5 ; 11,-8.5 10.75,-8.5 10.5,-8.25 6,-8.25 5.75,-8 C15.2
  Top Layer w0.2: C4.1@-4.226,-1.274 -4.226,-0.976 -3.7,-0.45 U1.48 ; R1.2 4.5,-2.75 U2.1 ; R2.1 R3.1
  Top Layer w0.6: Q1.3 -7.7,-4.8 -7.373,-5.127 -7.373,-7.177 -8.25,-8.054 -8.25,-10.5 -6.75,-12 -0.75,-12 8.25,-12 11,-9.25 11,-8.5 11,-3 10,-2 10,-1.25 10,2.5 P1.1
  Top Layer w1: -10.25,5.5 -10.25,-4.25 -9.7,-4.8 Q1.3
XC1: C8.1 U1.34 X2.1 | length 7.2
  Top Layer w0.2: C8.1 -5.25,8.35 X2.1 -4.825,8.325 -4.25,7.75 -4.25,7.129 -3.294,6.173 -2.348,6.173 -1.4,5.225 U1.34
XC2: C5.1 U1.35 X2.3 | length 7.5
  Top Layer w0.2: C5.1 -6.8,7.25 X2.3 -6.05,6.5 -4.083,6.5 -3.429,5.846 -2.483,5.846 -1.8,5.163 U1.35
XL1: C2.1 U1.2 X1.1 | length 5.3
  Top Layer w0.2: C2.1 -4.099,-3.877 X1.1 -1.8,-2.628 U1.2
XL2: C6.1 U1.3 X1.2 | length 4.7
  Top Layer w0.2: U1.3 -1.4,-4.075 X1.2 -0.672,-4 C6.1
pads on no net: A1.2 MH1.MH MH2.MH U1.44 U2.0 U2.2 U2.3 U2.4 U2.5 U2.6 U2.14 U2.15 U2.16 U2.17 U2.19

## Polygon pours and split planes (outlines as drawn)
GND on Bottom Layer (solid): -0.25,-17.25 -3.25,-17 -5.25,-16.5 -8.5,-15 -11,-13.25 -13.75,-10.5 -15.5,-7.5 -16.5,-5 -17.25,-1.5 -17,2.5 -16.25,5.75 -14.5,9.25 -12.5,11.75 -10,14 -6.75,15.75 -4,16.75 -0.5,17.25 2.75,17 6,16.25 9.25,14.5 12.5,11.75 14.75,8.75 16.75,3.75 17,1.75 17.25,-1 16.75,-3.5 16,-6.25 14.75,-9 11.75,-12.5 7.5,-15.5 4,-16.75 0.75,-17.25

## Silkscreen, mask and mechanical layers (free items; w line width, h text height)
Top Overlay:
  text "SWO" at 2.5,11 h0.6
  text "RST" at 4.5,11 h0.6
  text "GND" at 2.5,8.5 h0.6
  text "DIO" at 4.5,8.5 h0.6
  text "CLK" at 2.5,6.5 h0.6
  text "VDD" at 4.5,6.5 h0.6
Mechanical 1:
  circle w0.254: c0,0 r17.502
Drill Drawing:
  the board outline again, w1.2

## Text inside footprints (layer, text, board x,y; h text height)
P1: Top Overlay "4" at 7,4 h0.6; Top Overlay "1" at 10.5,4 h0.6; Top Overlay "3" at 10,13 h0.6; Top Overlay "6" at 7,13 h0.6